# EAGLE board midigw (EAGLE 5.12)
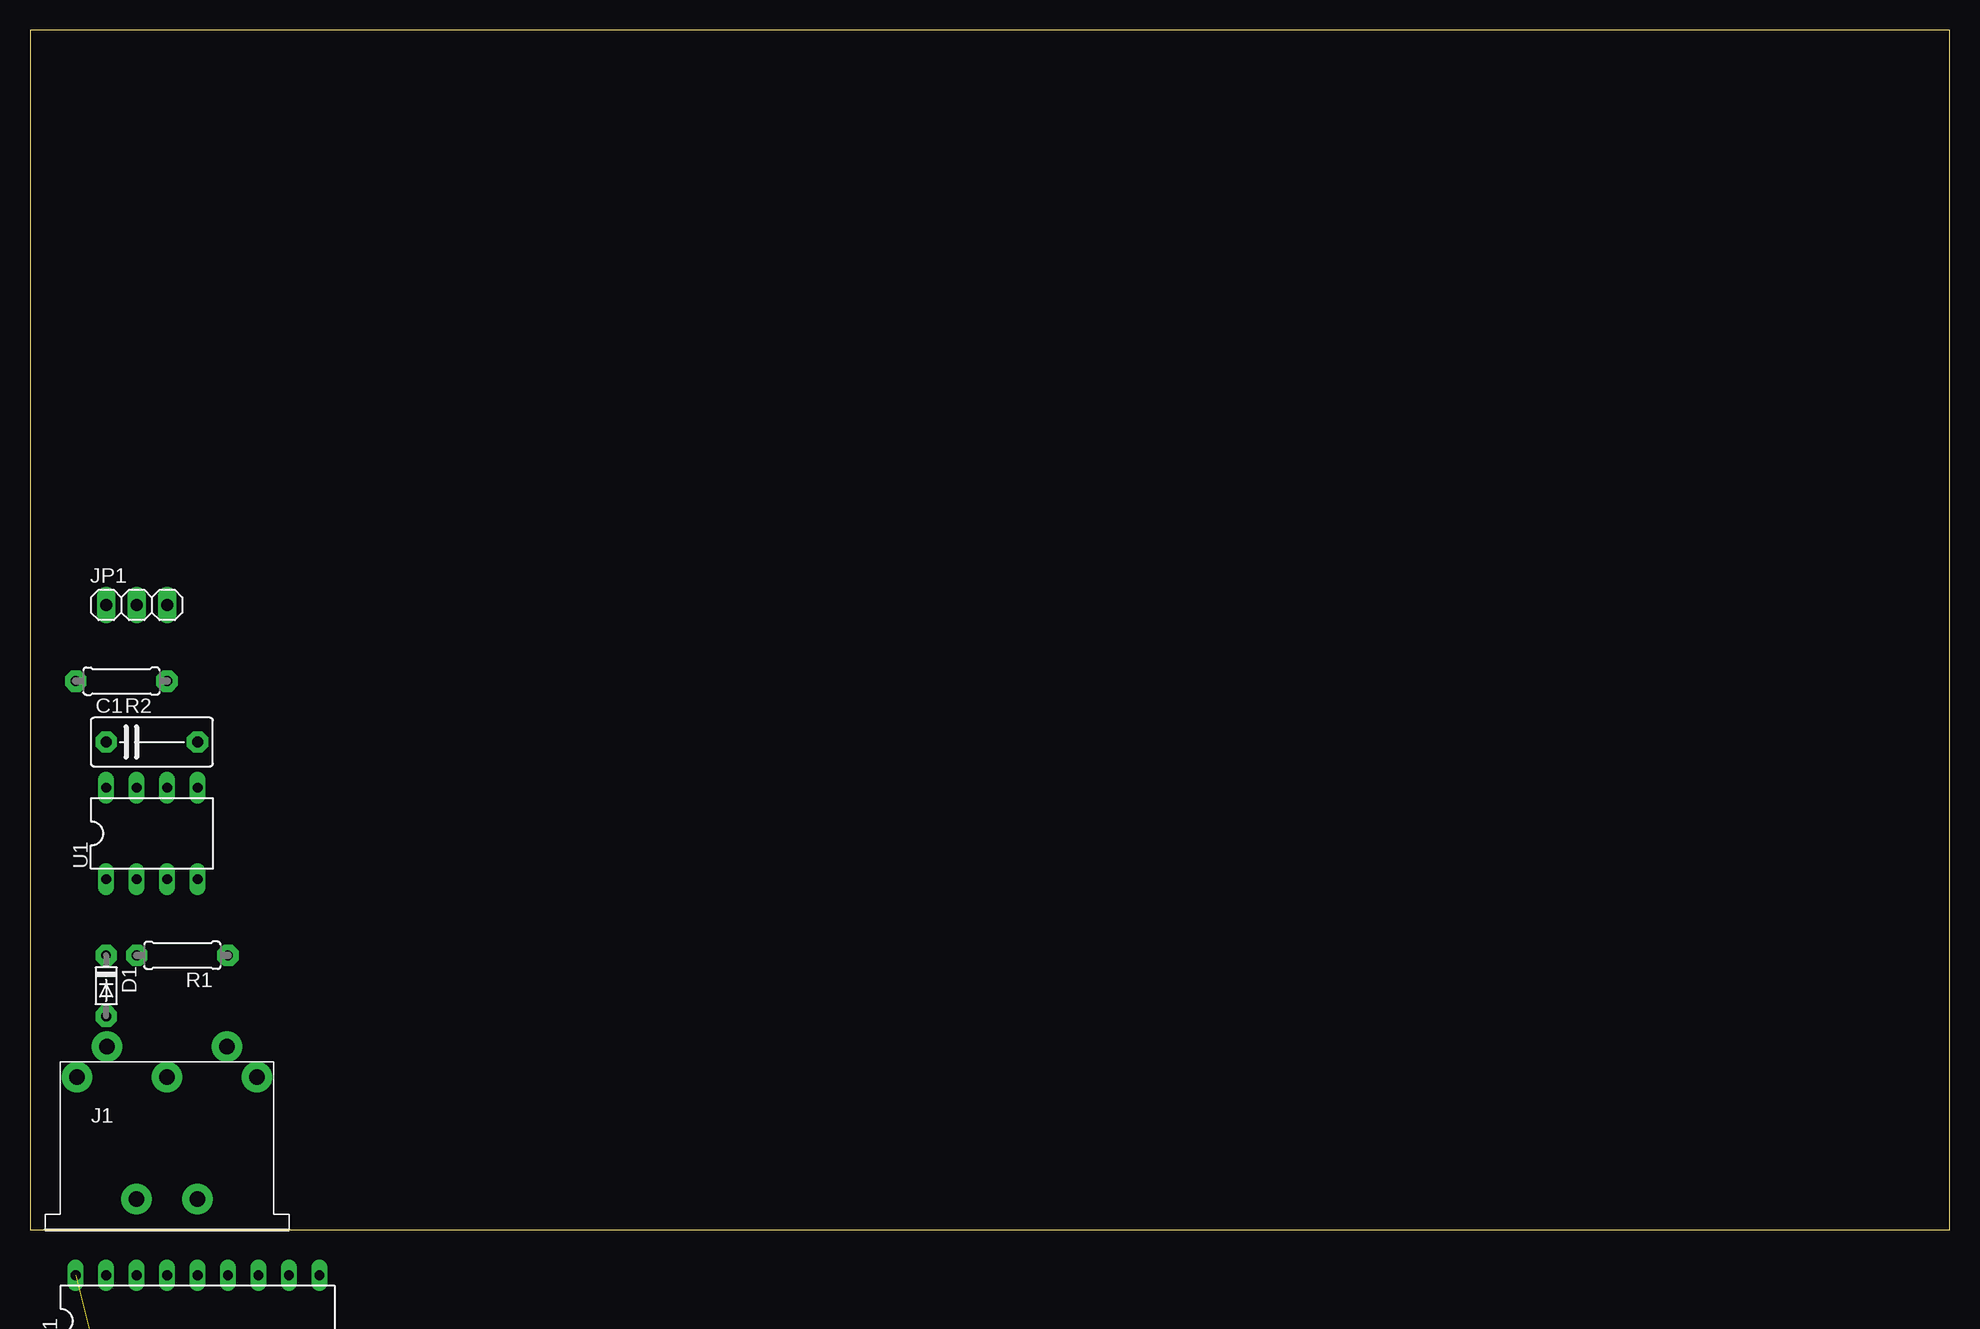
[diagram p0: board, top side]
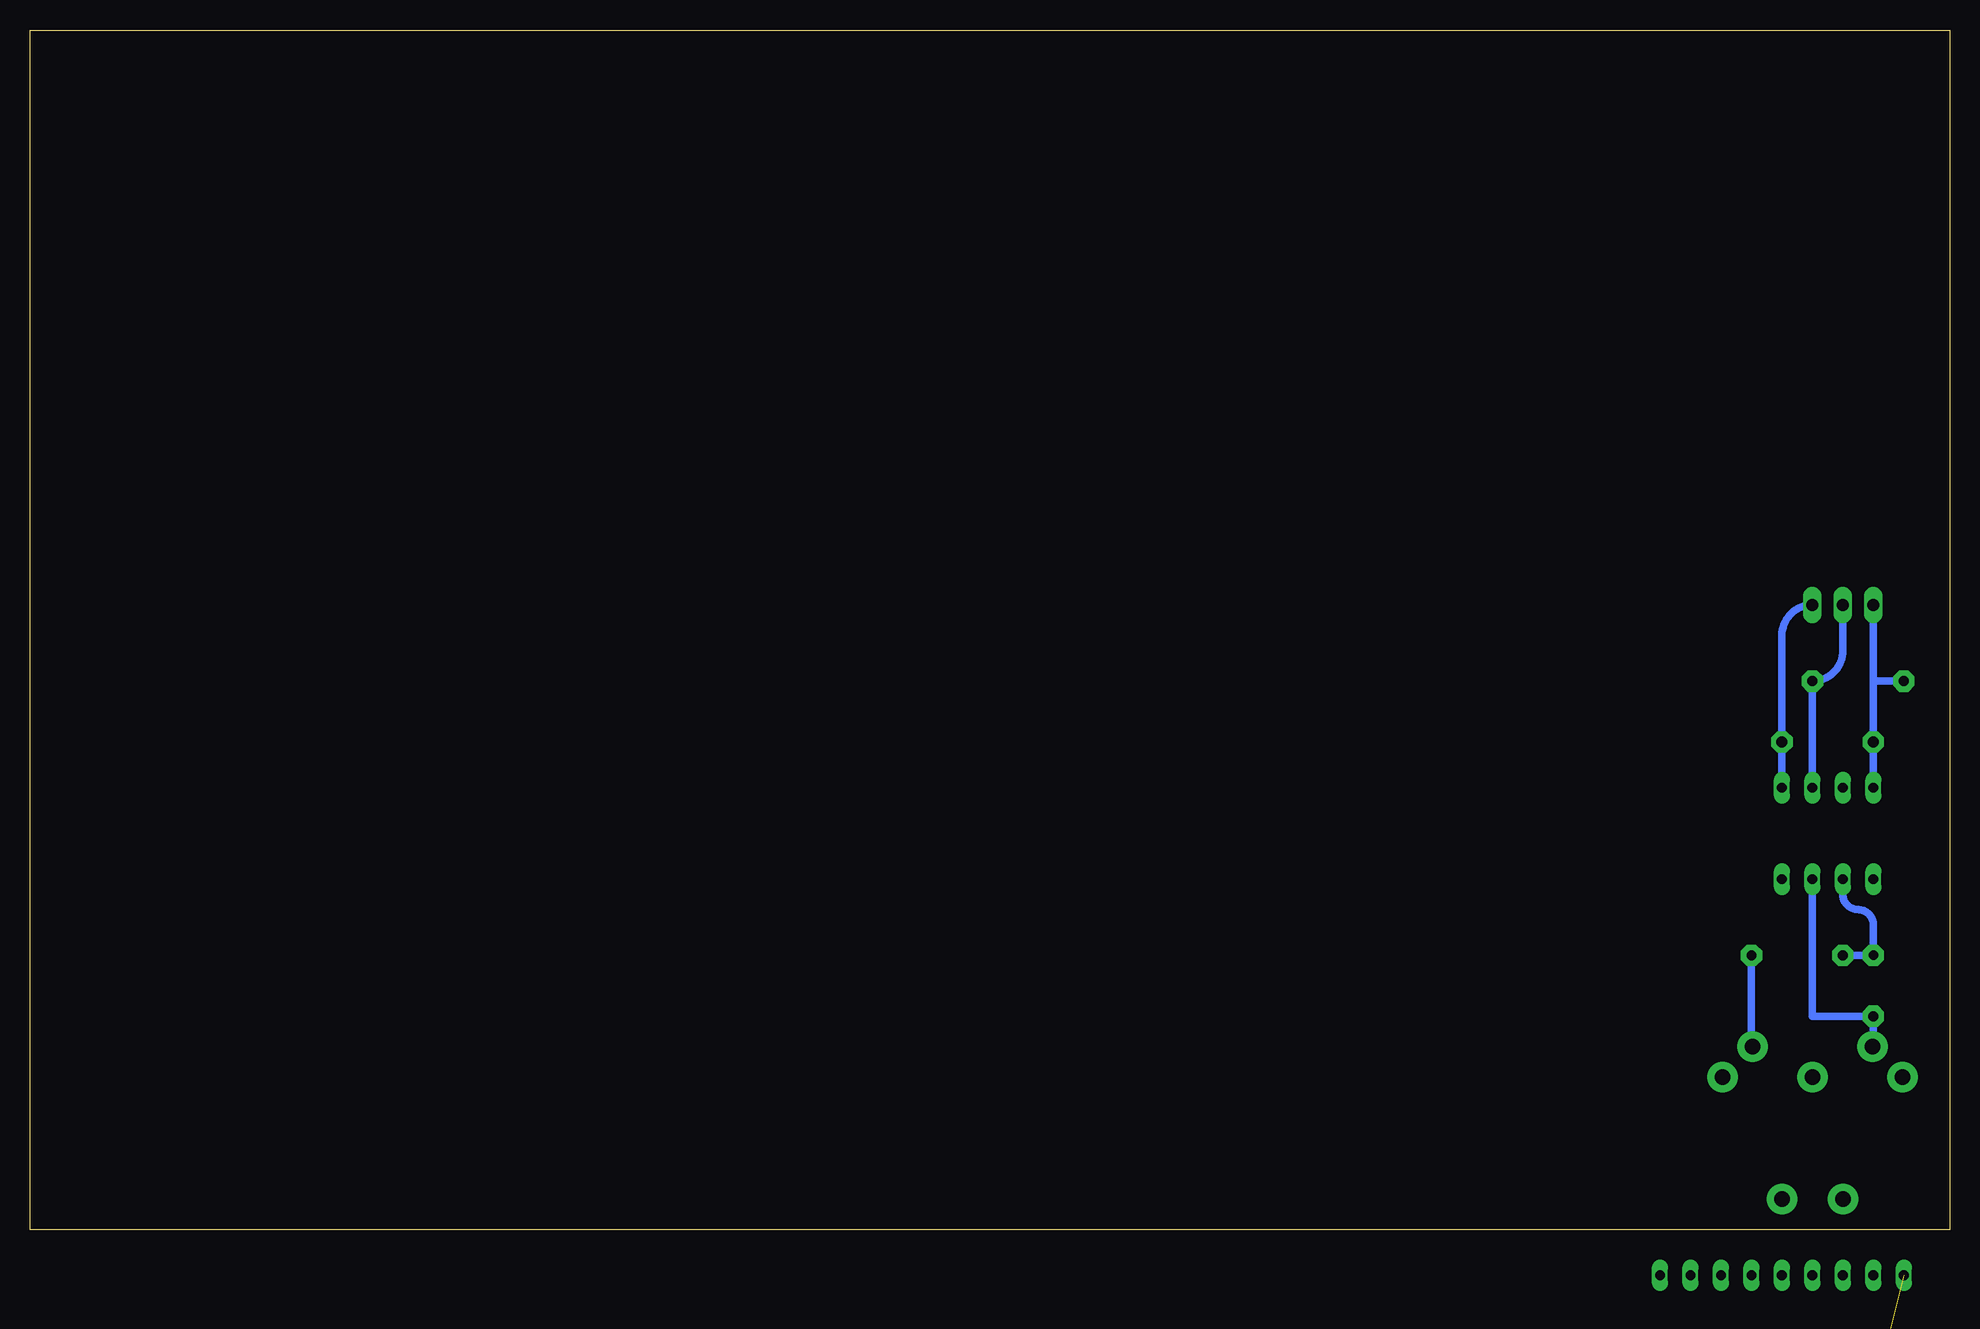
[diagram p1: board, bottom side, seen from below]

Size 160 x 100 mm. Coordinates in mm from the lower left corner, seen from the top.
Outline: 0,0 160,0 160,100 0,100 0,0
Copper layers (1*16): Top 0.035mm / dielectric 1.5mm / Bottom 0.035mm
Design rules "default": minimum track width 10mil, minimum drill 24mil, track to track 8mil, track to pad 8mil, pad to pad 8mil, via to via 8mil, smd to smd 8mil, copper to edge 40mil, drill to drill 8mil, minimum pad ring 10mil, minimum via ring 8mil, stop-mask expansion 4mil, vias tented up to drill 0mil, thermal gap 10mil

## Footprints (pad centres in the part's own frame; a part is rotated, then mirrored left to right if it is on the bottom)
C075-042X103 = drill 0.914 pad 1.778 octagon: 1 -3.81,0; 2 3.81,0
DO34-5-SMALLFOOT = drill 0.813 pad 1.778 octagon: A 2.54,0 | drill 0.8 pad 1.778 octagon: C -2.54,0
DIN5P-2 = drill 1.3 pad 2.54 round: 1 7.5,12.7; 2 0,12.7; 3 -7.5,12.7; 4 5,15.24; 5 -5,15.24; SHIELD 2.54,2.54; SHIELD2 -2.54,2.54
1X03 = drill 1.016 long: 1 -2.54,0; 2 0,0; 3 2.54,0
DIL08 = drill 0.813 long: 1 -3.81,-3.81; 2 -1.27,-3.81; 3 1.27,-3.81; 4 3.81,-3.81; 5 3.81,3.81; 6 1.27,3.81; 7 -1.27,3.81; 8 -3.81,3.81
0207/7_SMALLFOOT = drill 0.813 pad 1.778 octagon: 1 -3.81,0; 2 3.81,0
DIL18 = drill 0.813 long: 1 -10.16,-3.81; 2 -7.62,-3.81; 3 -5.08,-3.81; 4 -2.54,-3.81; 5 0,-3.81; 6 2.54,-3.81; 7 5.08,-3.81; 8 7.62,-3.81; 9 10.16,-3.81; 10 10.16,3.81; 11 7.62,3.81; 12 5.08,3.81; 13 2.54,3.81; 14 0,3.81; 15 -2.54,3.81; 16 -5.08,3.81; 17 -7.62,3.81; 18 -10.16,3.81

## Placement (x,y rotation side)
C1  0.1u  [C075-042X103]  10.16,40.64 0 top
D1  1N4148H5S  [DO34-5-SMALLFOOT]  6.35,20.32 270 top
J1  MIDI IN  [DIN5P-2]  11.43,0 0 top
JP1  interface  [1X03]  8.89,52.07 0 top
Q1  MCP2551  [DIL08]  7.62,-20.32 0 top  (outside the outline)
R1  220  [0207/7_SMALLFOOT]  12.7,22.86 180 top
R2  1k  [0207/7_SMALLFOOT]  7.62,45.72 180 top
U1  TLP552  [DIL08]  10.16,33.02 0 top
U$1  MCP2515DIL  [DIL18]  13.97,-7.62 0 top  (outside the outline)

## Library data of the parts
C1 J1 Q1 R1 R2 U1 = akihabara
D1 = diode
JP1 = pinhead
U$1 = MCP2515_MT

## Nets
GND: Q1.2 Q1.8 U$1.9
N$1: D1.C R1.2 U1.2
N$2: D1.A J1.5 U1.3
N$3: J1.4 R1.1
N$4: C1.1 JP1.1 R2.2 U1.8
N$5: C1.2 JP1.3 U1.5
N$6: JP1.2 R2.1 U1.6
N$7: Q1.1 U$1.1
N$8: Q1.4 U$1.2
VCC: Q1.3 U$1.18

## Tracks (layer width: path | path; a pad name or v marks a point on that pad's centre or on a via)
GND  (2 unrouted)
N$1
  Bottom 0.61: U1.2 8.89,27.94 arc-90 7.62,26.67 arc90 6.35,25.4 D1.C R1.2
N$2
  Bottom 0.61: J1.5 arc-90 6.35,15.32 D1.A 11.43,17.78 U1.3
N$3
  Bottom 0.61: J1.4 arc90 16.51,15.32 R1.1
N$4
  Bottom 0.61: U1.8 C1.1 6.35,45.72 | 6.35,45.72 JP1.1 | 6.35,45.72 R2.2
N$5
  Bottom 0.61: U1.5 C1.2 13.97,49.53 arc90 JP1.3
N$6
  Bottom 0.61: U1.6 R2.1 arc-90 8.89,48.26 JP1.2
N$7  (1 unrouted)
N$8  (1 unrouted)
VCC  (1 unrouted)